# Altium PCB Module_AFE_A.PcbDoc
Units mil, origin at the board's own origin, x right, y up, seen from the top; angles counter-clockwise.
Board outline 730 x 620 mil, 4 copper layers (Top Copper Layer, Internal Copper Layer 1, Internal Copper Layer 2, Bottom Copper Layer), stack 62.205 mil thick; 14 components, 32 nets, 97 pads, 13 vias.
Unrouted connection lines stored in the file: 2.
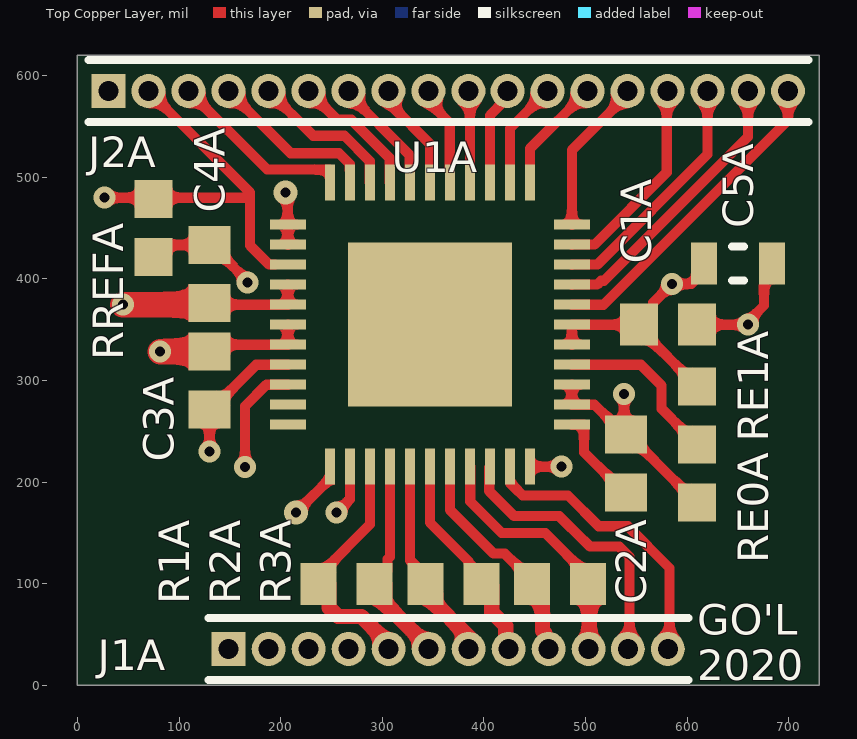
[diagram p0: Top Copper Layer view]
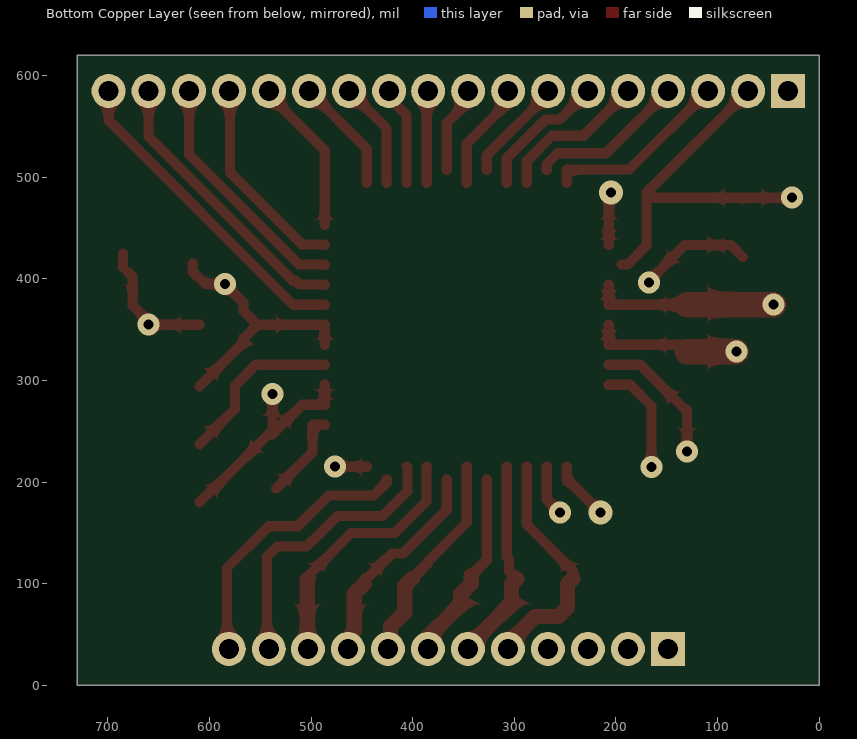
[diagram p1: Bottom Copper Layer view, seen from below]
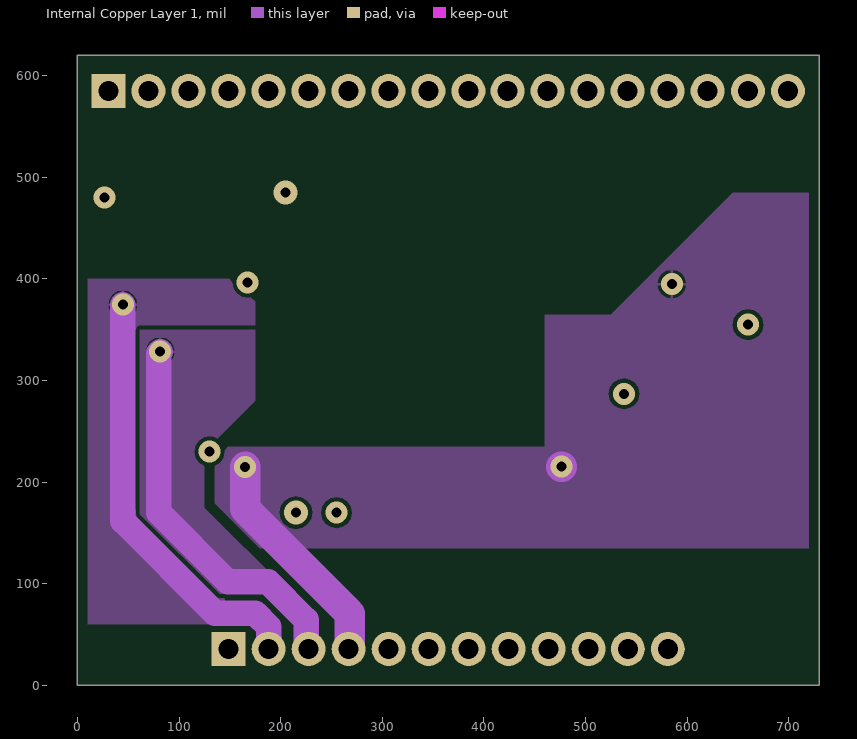
[diagram p2: Internal Copper Layer 1]
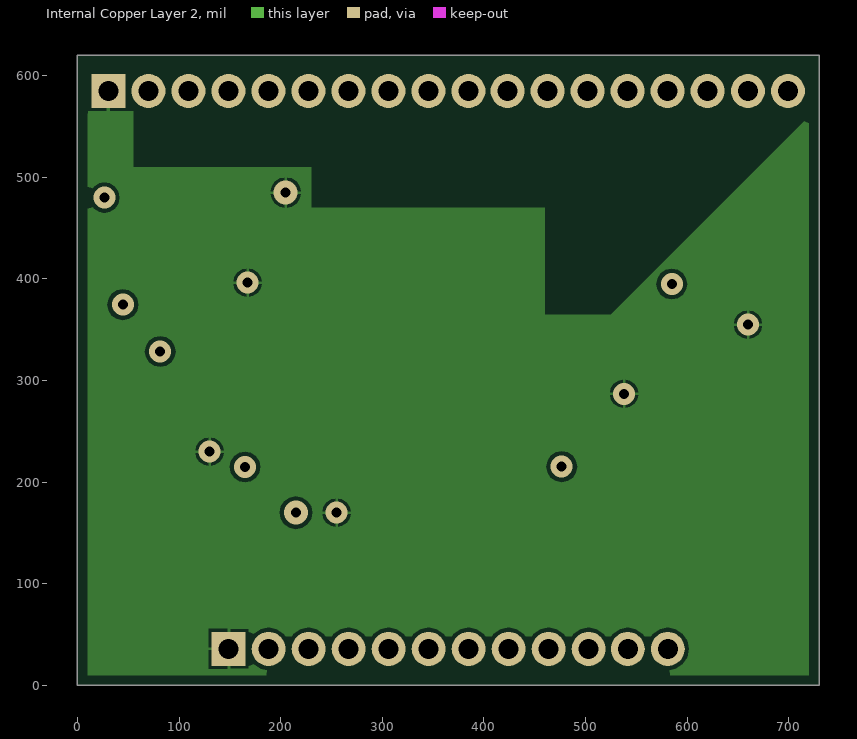
[diagram p3: Internal Copper Layer 2]
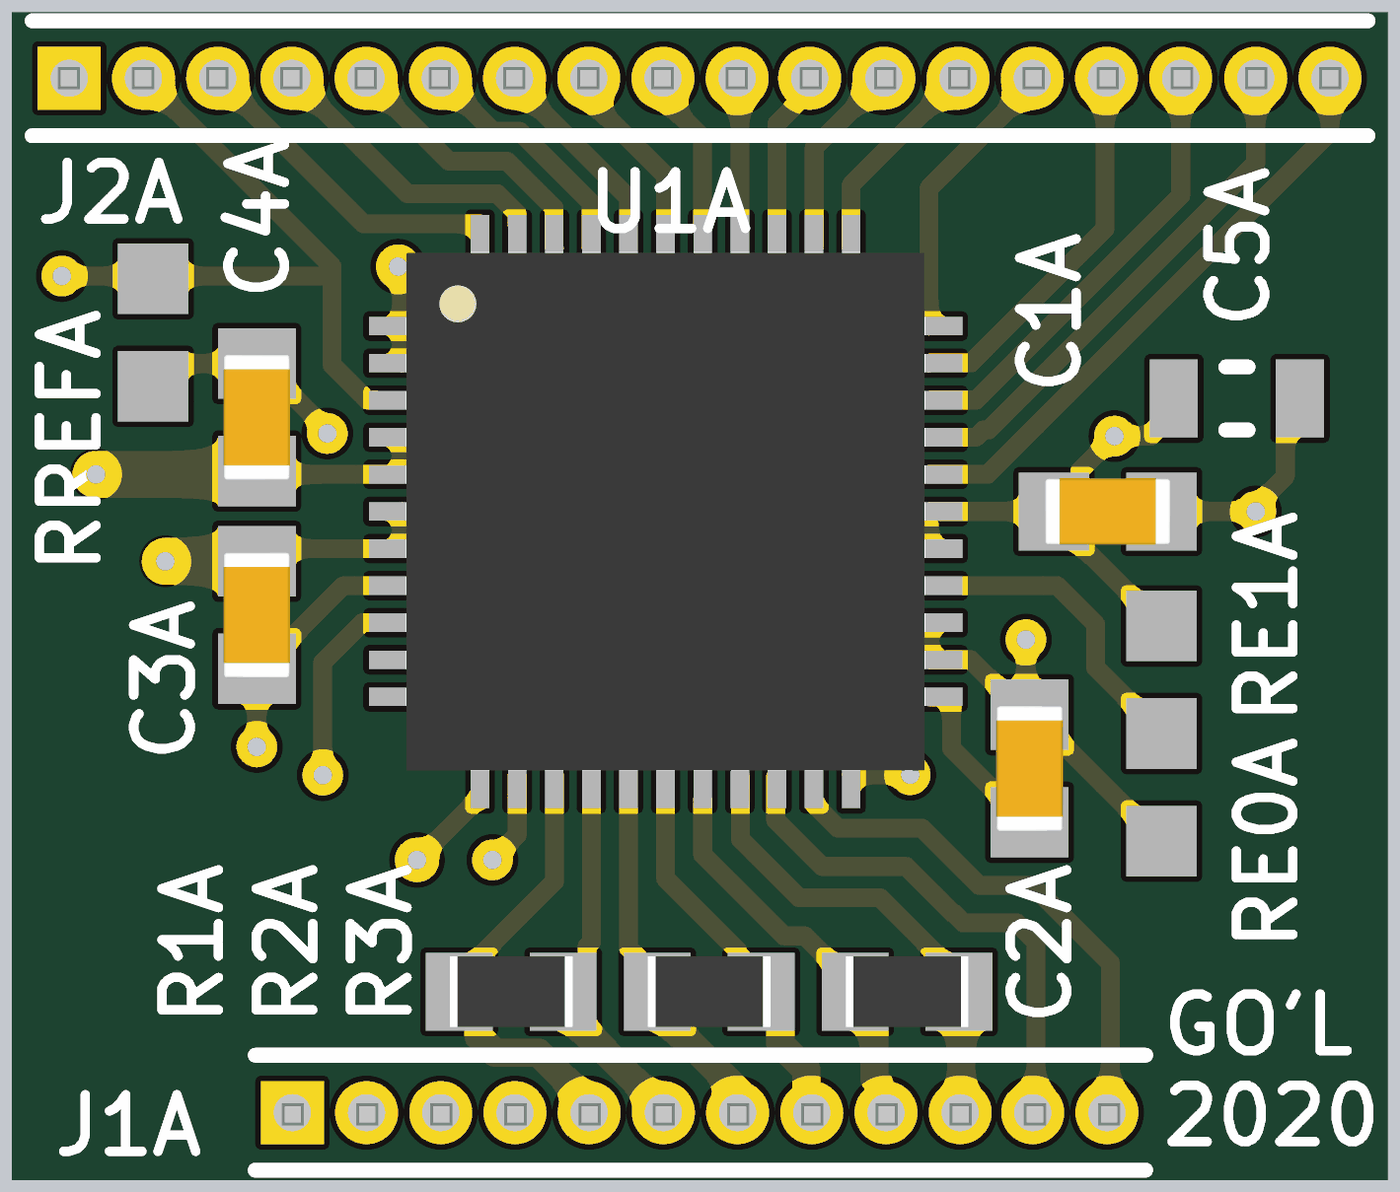
[diagram p4: 3D render of the assembled board from above, using the file's embedded part models]

## Layer stack, top to bottom
Top Solder: solder mask 0.3937, Solder Resist, Dk 3.5
Top Copper Layer: signal copper 1.378
Dielectric 1: prepreg 8.6614, FR-4, Dk 4.2
Internal Copper Layer 1: signal copper 1.378
Dielectric 2: core 39.3701, FR-4, Dk 4.2
Internal Copper Layer 2: signal copper 1.378
Dielectric 3: prepreg 8.6614, FR-4, Dk 4.2
Bottom Copper Layer: signal copper 1.378
Bottom Solder: solder mask 0.3937, Solder Resist, Dk 3.5

## Board outline
0,0 730,0 730,620 0,620

## Design rules (kind name [scope] priority, off if disabled: settings)
BoardOutlineClearance [All] p1: gap=9.84 ignorepadtopadclearanceinfootprint=FALSE
Clearance [All] p1: gap=4 ignorepadtopadclearanceinfootprint=FALSE
ComponentClearance [All] p1: gap=3.94 collisioncheckmode=3 verticalgap=3.94 showdistances=FALSE
DiffPairsRouting [All] p1: maxlimit=10 minlimit=10 mostfreqgap=10 toplayer_minwidth=15 toplayer_maxwidth=15 toplayer_prefwidth=15 midlayer1_minwidth=15 midlayer1_maxwidth=15 midlayer1_prefwidth=15 midlayer2_minwidth=15 midlayer2_maxwidth=15 midlayer2_prefwidth=15 bottomlayer_minwidth=15 bottomlayer_maxwidth=15 bottomlayer_prefwidth=15 maxuncoupledlength=500
HoleSize [All] p1: absolutevalues=TRUE maxlimit=100 minlimit=3.94 maxpercent=80.000 minpercent=20.000
HoleToHoleClearance [All] p1: gap=10.83 allowstackedmicrovias=TRUE
MinimumAnnularRing [All] p1: minimumring=3.94
MinimumSolderMaskSliver [All] p1: minsoldermaskwidth=2.95
PlaneClearance [All] p1: clearance=2.95
PlaneConnect [All] p1: planeconnectstyle=Relief reliefexpansion=5.91 reliefentries=4 reliefconductorwidth=2.95 reliefairgap=2.95
PolygonConnect [All] p1: connectstyle=Relief reliefconductorwidth=2.95 reliefentries=4 polygonreliefangle="90 Angle" airgapwidth=2.95
RoutingVias [All] p1: holewidth=9.84 width=23.62 viastyle="Through Hole" minholewidth=3.94 minwidth=7.87 maxholewidth=28 maxwidth=50
SilkToSilkClearance [All] p1: silktosilkclearance=5.91
SilkToSolderMaskClearance [IsPad] p1: minsilkscreentomaskgap=5.91 clearancetoexposedcopper=TRUE
SolderMaskExpansion [All] p1: expansion=2.95 istentingtop=FALSE
Width [All] p1: maxlimit=1968.5 minlimit=2.95 preferedwidth=5.91
21 further rules are at their usual default settings.

## Classes and differential pairs
net class ELEC[0..15]: ELEC0 ELEC1 ELEC2 ELEC3 ELEC4 ELEC5 ELEC6 ELEC7 ELEC8 ELEC9 ELEC10 ELEC11 ELEC12 ELEC13 ELEC14 ELEC15
component class U_intanRHS2116: C1A C2A C3A C4A C5A U1A
component class Module_AFE: J1A J2A R1A R2A R3A RE0A RE1A RREFA
differential pair SCLK1h: +SCLK1h_P -SCLK1h_N
differential pair nCS1h: +nCS1h_P -nCS1h_N
differential pair MOSI1h: +MOSI1h_P -MOSI1h_N
differential pair MISO1h: +MISO1h_P -MISO1h_N

## Components (designator, comment, footprint, x,y, rotation, side; value= is the part's Value field where it differs from the comment)
C1A "GRM188R71H104KA93D" CAPC1608X90X35ML10T15 581.46,355 r180 top (schematic designator C1)
C2A "GRM188R71H103KA01D" CAPC1608X90X35ML10T15 540,218.54 r270 top (schematic designator C2)
C3A "GRM188R71H104KA93D" CAPC1608X90X35ML10T15 130,300 r90 top (schematic designator C3)
C4A "GRM188R71H104KA93D" CAPC1608X90X35ML10T15 130,405 r270 top (schematic designator C4)
C5A "C1608X5R1A106K080AC" CAPC1608X90X20ML10 650,415 r180 top (schematic designator C5)
J1A "1mm_12pin" 1MM_12PIN 364.93,35.83 r90 top (schematic designator J1)
J2A "1mm_18pin" 1MM_18PIN 364.93,585 r90 top (schematic designator J2)
R1A "CRCW0603100RFKEA" RESC1609X50X30ML8T20 265,100 r0 top (schematic designator R1)
R2A "CRCW0603100RFKEA" RESC1609X50X30ML8T20 475,100 r0 top (schematic designator R2)
R3A "CRCW0603100RFKEA" RESC1609X50X30ML8T20 370,100 r0 top (schematic designator R3)
RE0A "CRCW06030000Z0EAHP" RESC1609X55X30NL10T20 610,208.54 r90 top (schematic designator RLEN)
RE1A "CRCW06030000Z0EAHP" RESC1609X55X30NL10T20 610,265.67 r90 top (schematic designator RLE)
RREFA "CRCW06030000Z0EAHP" RESC1609X55X30NL10T20 75,450 r90 top (schematic designator RREF)
U1A "Intan Technologies RHS2116 chip" QFN44_7_X_7 346.89,355 r0 top (schematic designator U1)

## Footprints (in the part's own frame and the unit in brackets; to place one, negate y for a bottom-side part, rotate by r counter-clockwise, add the part's x,y. Pads: shape width x height; smd on the part's side, far side on the other; paste and mask are expansions set on the pad)
1MM_12PIN [mm]
  rect 0.85x0.85 hole 0.5: 1(0,5.489)
  round 0.85 hole 0.5: 2(0,4.489) 3(0,3.488) 4(0,2.488) 5(0,1.488) 6(0,0.489) 7(0,-0.512) 8(0,-1.512) 9(0,-2.512) 10(0,-3.512) 11(0,-4.489) 12(0,-5.489)
  silkscreen extent -0.77,-6.01 0.77,5.99, body extent -0.66,-6.02 0.61,5.98, height 1
1MM_18PIN [mm]
  rect 0.85x0.85 hole 0.5: 1(0,8.494)
  round 0.85 hole 0.5: 2(0,7.494) 3(0,6.494) 4(0,5.494) 5(0,4.494) 6(0,3.494) 7(0,2.494) 8(0,1.494) 9(0,0.494) 10(0,-0.506) 11(0,-1.483) 12(0,-2.483) 13(0,-3.483) 14(0,-4.483) 15(0,-5.483) 16(0,-6.483) 17(0,-7.494) 18(0,-8.494)
  silkscreen extent -0.77,-9.01 0.77,8.99, body extent -0.64,-9 0.63,9, height 1
CAPC1608X90X20ML10 [mm] "Chip Capacitor, 2-Leads, Body 1.70x0.90mm, IPC Low Density"
  rect 0.65x1.05 smd: 1(-0.85,0) 2(0.85,0)
  silkscreen extent -0.15,-0.43 0.15,0.43, body extent -0.85,-0.45 0.85,0.45, height 0.9
CAPC1608X90X35ML10T15 [mm] "Chip Capacitor, 2-Leads, Body 1.7x0.9mm, IPC Low Density"
  rect 0.95x1.05 smd: 1(-0.725,0) 2(0.725,0)
  body extent -0.85,-0.45 0.85,0.45, height 0.9
QFN44_7_X_7 [mm]
  rect 0.9x0.25 smd: 1(-3.55,2.5) 2(-3.55,2) 3(-3.55,1.5) 4(-3.55,1) 5(-3.55,0.5) 6(-3.55,0) 7(-3.55,-0.5) 8(-3.55,-1) 9(-3.55,-1.5) 10(-3.55,-2) 11(-3.55,-2.5) 23(3.55,-2.5) 24(3.55,-2) 25(3.55,-1.5) 26(3.55,-1) 27(3.55,-0.5) 28(3.55,0) 29(3.55,0.5) 30(3.55,1) 31(3.55,1.5) 32(3.55,2) 33(3.55,2.5)
  rect 0.25x0.9 smd: 12(-2.5,-3.55) 13(-2,-3.55) 14(-1.5,-3.55) 15(-1,-3.55) 16(-0.5,-3.55) 17(0,-3.55) 18(0.5,-3.55) 19(1,-3.55) 20(1.5,-3.55) 21(2,-3.55) 22(2.5,-3.55) 34(2.5,3.55) 35(2,3.55) 36(1.5,3.55) 37(1,3.55) 38(0.5,3.55) 39(0,3.55) 40(-0.5,3.55) 41(-1,3.55) 42(-1.5,3.55) 43(-2,3.55) 44(-2.5,3.55)
  rect 4.1x4.1 smd: CENTER(0,0)
  body extent -3.5,-3.5 3.5,3.5, height 0.77
RESC1609X50X30ML8T20 [mm] "Chip Resistor, 2-Leads, Body 1.65x0.95mm, IPC Low Density"
  rect 0.9x1.05 smd: 1(-0.7,0) 2(0.7,0)
  body extent -0.82,-0.48 0.82,0.48, height 0.5
RESC1609X55X30NL10T20 [mm] "Chip Resistor, 2-Leads, Body 1.60x0.85mm, IPC Medium Density"
  rect 0.95x0.95 smd: 1(-0.725,0) 2(0.725,0)
  body extent -0.85,-0.48 0.85,0.48, height 0.55

## Part data
C1A C3A C4A: library part CMP-2100-03643-1, "Chip Capacitor, 0.1 uF, +/- 10%, 50 V, -55 to 125 degC, 0603 (1608 Metric), RoHS, Tape and Reel", Capacitance=100nF, Case Code (Imperial)=0603, Case Code (Metric)=1608, Dielectric=X7R, Dielectric Material=Ceramic, Insulation Resistance=10GR, Manufacturer=Murata, Max Operating Temperature=125degC, Min Operating Temperature=-55degC, Package Description="2-Pin Surface Mount Device, Body 1.6 x 0.8 mm", Package Quantity=1, Tolerance=10%, Voltage=50V, Case/Package=0603, Contact Plating=Tin, Datasheet URL=http://psearch.en.murata.com/capacitor/product/GRM188R71H104KA93%23.pdf, Datasheet Version=42675.0, Depth=0.8mm, Height=0.8mm, Lead Free=LeadFree, Length=1.6mm, Manufacturer URL=http://www.murata.com/, Material=Ceramic, Mount=SurfaceMount, Number of Pins=2, Package Reference=0603, Packaging=TapeandReel, Radiation Hardening=No, REACH SVHC=NoSVHC, RoHSCompliant=true, Termination=SMD/SMT, Thickness=0.035inch, Voltage Rating=50V, Voltage Rating (DC)=50V, Width=0.8mm
C2A: library part CMP-2100-03642-1, "Chip Capacitor, 10 nF, +/- 10%, 50 V, -55 to 125 degC, 0603 (1608 Metric), RoHS, Tape and Reel", Capacitance=10nF, Case Code (Imperial)=0603, Case Code (Metric)=1608, Dielectric=X7R, Dielectric Material=Ceramic, Insulation Resistance=10GR, Manufacturer=Murata, Max Operating Temperature=125degC, Min Operating Temperature=-55degC, Package Description="2-Pin Surface Mount Device, Body 1.6 x 0.8 mm", Package Quantity=1, Tolerance=10%, Voltage=50V, Case/Package=0603, Datasheet URL=http://search.murata.co.jp/Ceramy/image/img/A01X/G101/ENG/GRM188R71H103KA01-01.pdf, Datasheet Version=42401.0, Depth=0.8mm, Height=0.8mm, Lead Free=LeadFree, Length=1.6mm, Manufacturer URL=http://www.murata.com/, Material=Ceramic, Mount=SurfaceMount, Number of Pins=2, Package Reference=0603, Packaging=TapeandReel, REACH SVHC=Unknown, RoHSCompliant=True, Termination=SMD/SMT, Thickness=0.035inch, Voltage Rating=50V, Voltage Rating (DC)=50V, Width=0.031inch
C5A: library part CMP-2000-04979-1, "Chip Capacitor, 10 uF, +/- 10%, 10 V, -55 to 85 degC, 0603 (1608 Metric), RoHS, Tape and Reel", Capacitance=10µF, Manufacturer=TDK, Operating Temperature=-55degC~85degC, Package / Case=0603(1608Metric), Package Description="2-Pin Surface Mount Device, Body 1.6 x 0.8 mm", Package Reference=603, PCN Part Number=MLCCPartNumberChange30/Nov/2012, Ratings=-, Standard Package=1, Temperature Coefficient=X5R, Tolerance=±10%, Voltage - Rated=10V, Applications=GeneralPurpose, Category=Capacitors, Datasheet URL=http://download.siliconexpert.com/pdfs/2015/4/21/15/54/45/779/tdk_/manual/37024850441143360mlcc_commercial_general_en.pdf, Datasheet Version=Mar-15, Design Resources=20WNon-IsolatedBuckLEDDriverUsingPLLNK460KG, Family=CeramicCapacitors, Features=-, Height - Seated (Max)=-, Kits=445-9003-KIT-ND-KITCAPCERHICAPMLCCSMD, Lead Spacing=-, Lead Style=-, Manufacturer URL=http://www.tdk.com/, Mounting Type=SurfaceMount,MLCC, Online Catalog=CSeries,GeneralPurpose, Other Names=445-7486-1, Packaging=CutTape(CT), Product Training Modules=CSeriesGeneralApplicationsSEAT,CCV,andTVCLDesignToolsGuidetoReplacinganElectrolyticCapacitorwithanMLCC, RoHS Information=RoHSCertificate-MLCC, Series=C, Size / Dimension="0.063\"Lx0.031\"W(1.60mmx0.80mm)", Thickness (Max)="0.035\"(0.90mm)"
R1A R2A R3A: library part CMP-1666-00008-4, "Chip Resistor, 100 Ohm, +/- 1%, 100 mW,-55 to 155 degC, 0603 (1608 Metric), RoHS, Tape and Ree", Manufacturer="Vishay Semiconductor", ComponentLink1Description="Manufacturer URL", ComponentLink1URL=http://www.vishay.com/, ComponentLink2Description=Datasheet, ComponentLink2URL=http://www.vishay.com/docs/20035/dcrcwe3.pdf, DatasheetVersion=06/2012, Mounting Technology="Surface Mount", PackageDescription="2-Pin Surface Mount Device, Body 1.575 x 0.85 mm", PackageReference=0603
RE0A RE1A RREFA: library part CMP-2000-03817-1, Manufacturer="Vishay Dale", Part Number=CRCW06030000Z0EAHP
U1A: library part RHS2116_QFN, Manufacturer="Intan Technologies", Manufacturer Part Number=RHS2116, ComponentLink1Discription=Datasheet, ComponentLink1URL=http://intantech.com/files/Intan_RHS2116_datasheet.pdf, ComponentLink2Discription="Bare Die", ComponentLink2URL=http://intantech.com/files/RHS2116_die_diagram.pdf, Pricing 1="1-24=325;  25-99=278;  100-249=233;  250-499=188;  500-999=151  (USD)", Supplier 1=Intan, Supplier Link 1=http://intantech.com/products_RHS2000.html, Supplier Part Number 1=RHS2116

## Via types
v1: diameter 21.65, hole 9.84, Top Copper Layer to Bottom Copper Layer, 11 vias
v2: diameter 23.62, hole 9.84, Top Copper Layer to Bottom Copper Layer, 2 vias

## Nets (pads, with @x,y where several pads share a name; then routed paths per layer and width w, separated by ;. In a path a pad name is that pad's centre, name@x,y a point inside that pad or via, vN(x,y) a via of type N, cw(c..) or ccw(c..) an arc to the next point about the centre after c; other vN are vias at no path point)
ELEC0: J2A.3 U1A.44 | length 181.5
  Top Copper Layer w10: J2A.3@111.12,583.42 186.82,507.72 248.14,507.72 248.46,507.39 U1A.44
ELEC1: J2A.4 U1A.43 | length 154.9
  Top Copper Layer w10: J2A.4 209.86,523.76 257.51,523.76 268.07,513.21 U1A.43@268.07,507.48
ELEC2: J2A.5 U1A.42 | length 149.6
  Top Copper Layer w10: J2A.5 232.09,540.91 262.87,540.91 287.75,516.02 287.75,494.84 U1A.42
ELEC3: J2A.6 U1A.41 | length 131.6
  Top Copper Layer w10: J2A.6 255.55,556.81 269.45,556.81 307.44,518.83 307.44,494.84 U1A.41
ELEC4: J2A.7 U1A.40 | length 102.5
  Top Copper Layer w10: J2A.7 266.73,582.03 327.12,521.64 U1A.40@327.12,507.48
ELEC5: J2A.8 U1A.39 | length 107.1
  Top Copper Layer w10: J2A.8 310.59,580.51 310.59,569.41 346.89,533.11 U1A.39
ELEC6: J2A.9 U1A.38 | length 86.2
  Top Copper Layer w10: J2A.9 349.96,580.51 349.96,570.04 366.5,553.5 U1A.38@366.5,507.48
ELEC7: J2A.10 U1A.37 | length 90.2
  Top Copper Layer w10: U1A.37 J2A.10@386.26,585
ELEC8: J2A.11 U1A.36 | length 97.4
  Top Copper Layer w10: U1A.36 406.03,494.84 406.03,561.03 414.22,569.22 414.22,569.56 423.31,578.65 J2A.11
ELEC9: J2A.12 U1A.35 | length 105.6
  Top Copper Layer w10: U1A.35 425.71,494.84 425.71,548.03 J2A.12
ELEC10: J2A.13 U1A.34 | length 113.7
  Top Copper Layer w10: U1A.34 445.32,528.27 J2A.13
ELEC11: J2A.14 U1A.33 | length 154.3
  Top Copper Layer w10: U1A.33 486.65,526.65 541.42,581.42 J2A.14
ELEC12: J2A.15 U1A.32 | length 203.2
  Top Copper Layer w10: U1A.32 486.73,433.82 508.83,433.82 580,504.99 580,584.21 J2A.15
ELEC13: J2A.16 U1A.31 | length 240.8
  Top Copper Layer w10: U1A.31 486.73,414.14 511.65,414.14 620.16,522.65 J2A.16
ELEC14: J2A.17 U1A.30 | length 278.7
  Top Copper Layer w10: U1A.30 486.73,394.45 511.51,394.45 515.29,398.23 518.23,398.23 659.98,539.98 J2A.17
ELEC15: J2A.18 U1A.29 | length 316.7
  Top Copper Layer w10: U1A.29 517.81,374.69 699.35,556.23 J2A.18
GND: C1A.1 C2A.1 C3A.1 C4A.1 C5A.1 J1A.1 J2A.1 RE0A.1 RREFA.1 U1A.1 U1A.2 U1A.8 U1A.13 U1A.24 U1A.25 | length 703.7
  Top Copper Layer w10: RREFA.1 87.09,433.54 C4A.1 131.97,433.54 164.5,401.01 164.5,399.32 v1(167.4,396.42) ; v1(130,230) C3A.1 131.97,271.46 176.03,315.52 ; 176.03,315.55 207.05,315.55 U1A.8 ; v2(205,485) 206.89,483.11 206.89,453.51 206.97,453.43 U1A.1 U1A.2 ; v1(255,170) 268.15,183.15 U1A.13 ; U1A.25 U1A.24 508.86,276.26 524.33,260.79 538.03,247.09 v1(538.03,286.97) ; C2A.1 541.97,247.09 595.35,193.7 596.3,193.7 RE0A.1 ; C1A.1 v1(660,355) 660,358.15 675.67,373.82 675.67,402.2 C5A.1@680,406.54 ; C5A.1@685,411.54 C5A.1@685,425
  Internal Copper Layer 1 w25: J1A.1@146.4,40.06 J1A.1@150.63,35.83
LVDS_EN: RE0A.2 RE1A.1 U1A.26 | length 169.3
  Top Copper Layer w10: U1A.26 554.37,315.63 575,295 575,272.13 RE0A.2@596.3,250.83 ; RE0A.2@596.3,250.79 RE0A.2
MISO1h_N: J1A.11 U1A.20 | length 280
  Top Copper Layer w10: U1A.20 405.31,214.6 405.31,191.15 429.88,166.57 474.33,166.57 499.02,141.89 499.47,141.89 504.78,136.57 533.43,136.57 543.43,126.57 J1A.11@543.43,35.83
MISO1h_P: J1A.12 U1A.21 | length 274.6
  Top Copper Layer w10: U1A.21@425.63,202.52 425.63,199.57 438.3,186.9 482.75,186.9 513.07,156.57 541.71,156.57 582.8,115.49 J1A.12@582.8,35.83
MOSI1h_N: J1A.9 R2A.1 U1A.18 | length 209.7
  Top Copper Layer w10: U1A.18@366.58,202.52 366.58,172.75 409.66,129.67 420.72,129.67 445.39,105 R2A.1@447.44,105
  Top Copper Layer w15: R2A.1 457.66,89.78 457.66,53.85 460.28,51.23 460.28,39.36 J1A.9
MOSI1h_P: J1A.10 R2A.2 U1A.19 | length 252.2
  Top Copper Layer w10: U1A.19 386.58,215.24 386.58,181.04 417.62,150 460.51,150 502.56,107.95 R2A.2@502.56,105
  Top Copper Layer w15: R2A.2@502.56,105 503.76,103.8 J1A.10@503.76,37.03
nCS1h_N: J1A.5 R1A.1 U1A.14 | length 238.9
  Top Copper Layer w10: R1A.1@242.44,105 242.44,112.95 287.83,158.34 U1A.14
  Top Copper Layer w15: R1A.1@242.44,105 247.66,99.78 247.66,76.44 256.44,67.66 279.53,67.66 302.8,44.39 302.8,41.14 J1A.5@308.11,35.83
nCS1h_P: J1A.6 R1A.2 U1A.15 | length 204.2
  Top Copper Layer w10: R1A.2@297.56,105 305.28,112.72 305.28,124.28 307.52,126.53 U1A.15
  Top Copper Layer w15: R1A.2@297.56,105 302.78,99.78 302.78,80.53 J1A.6@347.48,35.83
NetC2_2: C2A.2 U1A.23 | length 89.6
  Top Copper Layer w10: U1A.23 498.55,256.57 498.63,256.49 498.63,229.4 524.33,203.7 C2A.2@534.34,193.69
SCLK1h_N: J1A.7 R3A.1 U1A.16 | length 189.4
  Top Copper Layer w10: U1A.16@327.2,202.52 327.2,123.19 R3A.1@342.44,107.95
  Top Copper Layer w15: R3A.1 352.66,89.78 352.66,79.9 381.54,51.02 381.54,41.14 J1A.7@386.85,35.83 ; R3A.1@342.44,102.05 R3A.1@342.44,107.95
SCLK1h_P: J1A.8 R3A.2 U1A.17 | length 212.3
  Top Copper Layer w10: U1A.17 346.89,160.26 384.84,122.31 384.84,120.67 R3A.2@400.51,105
  Top Copper Layer w15: R3A.2@400.51,105 407.78,97.74 407.78,72.23 421.57,58.44 421.57,40.48 J1A.8@426.22,35.83
VDD: C1A.2 C5A.2 J1A.4 RE1A.2 U1A.9 U1A.22 U1A.27 U1A.28 | length 626.8
  Top Copper Layer w10: v1(165,215) 165,275 185.94,295.94 U1A.9 ; U1A.22 v1(476.65,215.24) ; U1A.27 486.65,350 ; U1A.28 C1A.2 ; RE1A.2 596.3,307.91 566.61,337.6 566.61,341.3 C1A.2 ; C5A.2 616.54,407.13 604.41,395 v1(585,395) 566.61,376.61 566.61,368.7 C1A.2
  Internal Copper Layer 1 w30: v1(165,215) 165,173.73 268.08,70.65 J1A.4@268.08,36.49 ; v1@476.41,215 v1(476.65,215.24)
VREF: J2A.2 RREFA.2 U1A.3 | length 368.4
  Top Copper Layer w10: v1(26.57,480) RREFA.2@73.54,480 ; J2A.2 169.99,484.89 169.99,432.82 188.67,414.14 U1A.3@194.41,414.14 ; RREFA.2 76.46,480 169.99,480
VSTIM-: U1A.CENTER
VSTIMN: C4A.2 J1A.2 U1A.4 U1A.5 | length 604.5
  Top Copper Layer w10: C4A.2@130,374.69 U1A.5 207.05,374.77 207.05,394.29 U1A.4
  Top Copper Layer w25: v1(44.69,374.69) C4A.2@130,374.69
  Internal Copper Layer 1 w25: v1(44.69,374.69) 44.69,161.6 135.33,70.96 174.99,70.96 188.38,57.57 188.38,37.45 J1A.2@190,35.83
VSTIMP: C3A.2 J1A.3 U1A.6 U1A.7 | length 526.6
  Top Copper Layer w10: C3A.2 136.77,335.31 U1A.7 U1A.6
  Top Copper Layer w25: v1(81.46,328.54) C3A.2
  Internal Copper Layer 1 w25: v1(81.46,328.54) 80,327.09 80,170 148.13,101.87 187.79,101.87 225.14,64.52 225.14,42.35 229.37,38.12 J1A.3@229.37,35.83
pads on no net: U1A.10 U1A.11 U1A.12
copper on no net: | length 51.3
  Top Copper Layer w10: v2@220.84,175.84 247.52,202.52 248.38,202.52 248.46,202.6 248.46,215.24
  other v2: 215,170

## Polygon pours and split planes (outlines as drawn)
VDD on Internal Copper Layer 1 "VDD_L02_P008" (solid, pour order 8): 179.37,135 730,135 730,485 645,485 525,365 460,365 460,235 135,235 135,179.37
VSTIMN on Internal Copper Layer 1 "VSTIMN_L02_P010" (solid, pour order 10): 0,60 0,400 175,400 175,350 50,350 50,180 145,85 145,60
VSTIMP on Internal Copper Layer 1 "VSTIMP_L02_P009" (solid, pour order 9): 205,95 125,175 125,230 175,280 175,350 60,350 60,170 140,90 199.66,90 206.46,83.19
GND on Internal Copper Layer 2 "GND_L03_P007" (solid, pour order 7): 730,0 730,620 0,620 0,0

## Other copper
Internal Copper Layer 1:
  region: 550,355
Internal Copper Layer 2:
  pour cut-out: 55,510 230,510 230,470 460,470 460,365 525,365 730,570 730,620 55,620

## Silkscreen, mask and mechanical layers (free items; w line width, h text height)
Top Overlay:
  text "GO'L / 2020" at 610,5 h30
Top Assembly:
  the board outline again, w5

## Dimensions
730,0 to 729.31,619.84 on Top Courtyard
0,0 to 730,0 on Top Courtyard